# Altium PCB sample.PcbDoc (part 2 of 2)
Units mm, origin at the board's own origin, x right, y up, seen from the top; angles counter-clockwise.
Board outline 130.3 x 75.3 mm, 2 copper layers (Top Layer, Bottom Layer); 117 components, 130 nets, 510 pads, 338 vias.
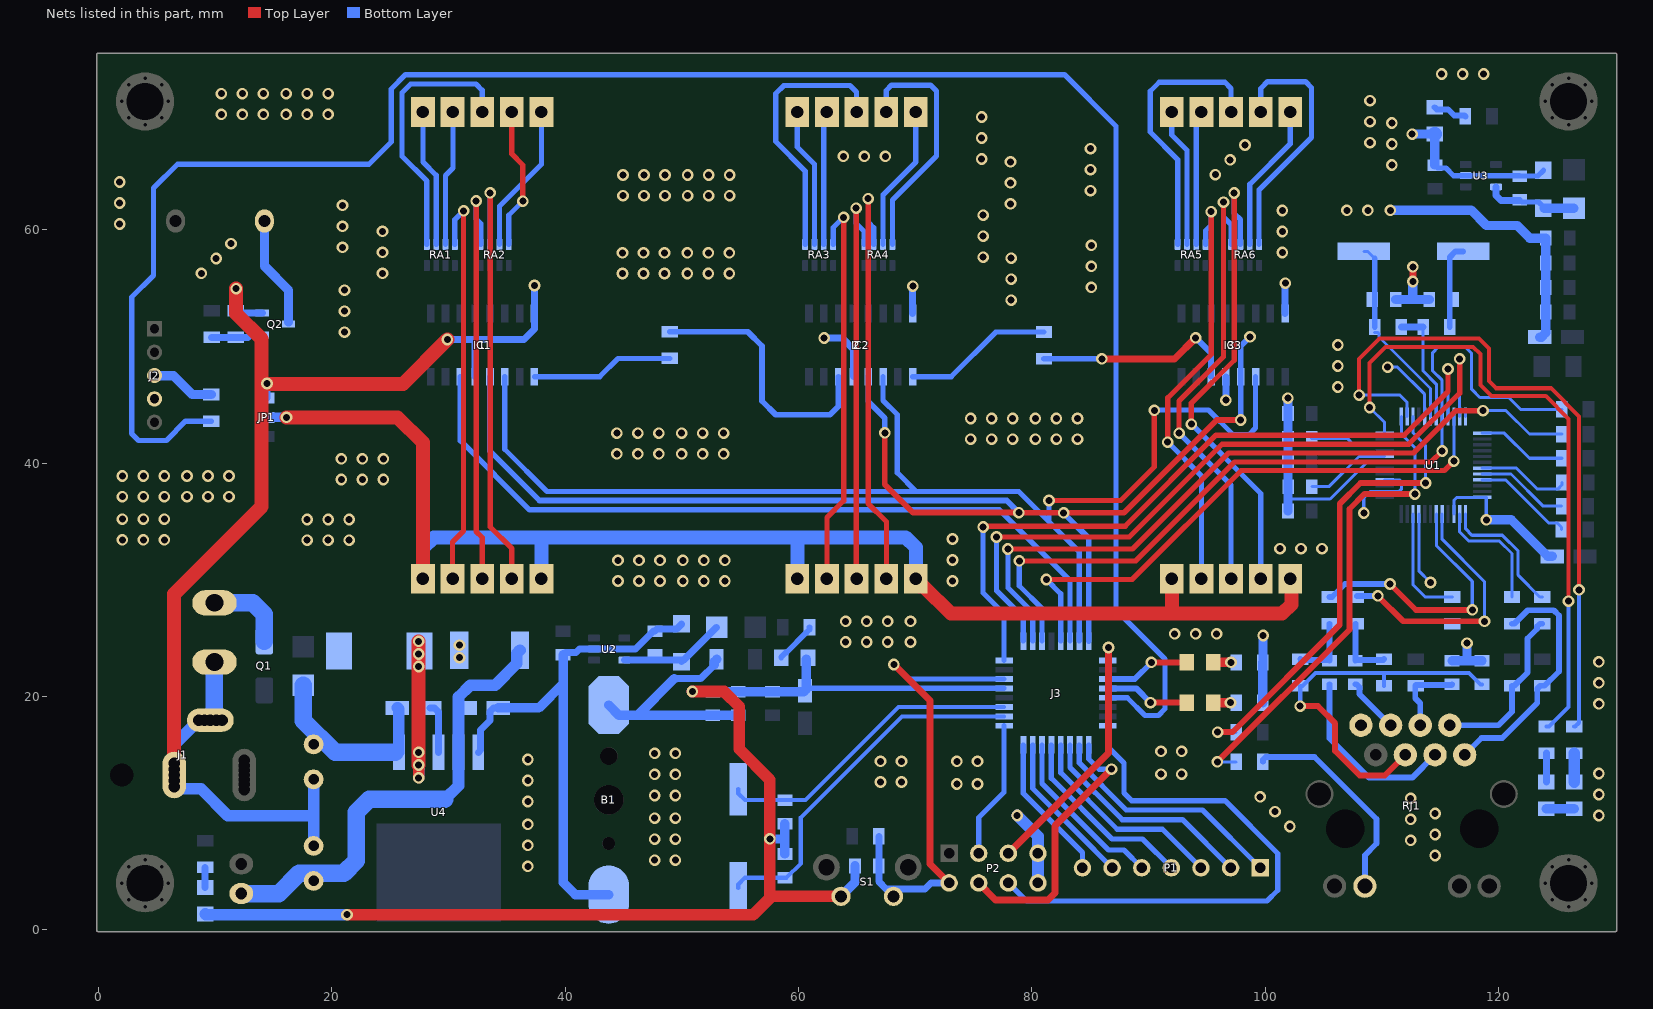
[diagram p2: the nets of this part, all layers, seen from the top]

## Via types
v1: diameter 1, hole 0.6, Top Layer to Bottom Layer, 338 vias

## Nets (pads, with @x,y where several pads share a name; then routed paths per layer and width w, separated by ;. In a path a pad name is that pad's centre, name@x,y a point inside that pad or via, vN(x,y) a via of type N, cw(c..) or ccw(c..) an arc to the next point about the centre after c; other vN are vias at no path point) (continued)
Column1: J3.30 P1.5 | length 14.8
  Bottom Layer w0.45: J3.30@80.875,15.85 80.875,12.55 86.575,6.85 87.895,6.85 P1.5@89.42,5.325
Column2: J3.31 P1.6 | length 13.3
  Bottom Layer w0.45: J3.31@80.075,15.85 80.075,12.13 83.905,8.3 P1.6@86.88,5.325
Column3: J3.32 P1.7 | length 12.6
  Bottom Layer w0.45: J3.32@79.275,15.85 79.275,11.7 84.34,6.635 P1.7@84.34,5.325
COM: 1.1 1.5 2.1 2.5 3.1 3.5 JP1.2 | length 120.5
  Top Layer w1.2: v1(16.125,43.925) 25.65,43.925 27.815,41.76 1.1@27.815,30.1 ; 2.5@70.06,30.1 70.06,29.846 70.476,29.43 70.73,29.43 73.06,27.1 92,27.1 ; 3.1@92,30.1 92,27.1 ; 3.5@102.16,30.1 102.25,30.01 102.25,27.9 101.45,27.1 92,27.1
  Bottom Layer w0.8: JP1.2@14.45,43.925 v1(16.125,43.925)
  Bottom Layer w1.2: 1.1@27.815,30.1 27.815,32.715 28.75,33.65 37.975,33.65 ; 1.5@37.975,30.1 37.975,33.65 ; 2.1@59.9,30.1 59.9,33.625 59.875,33.65 ; 2.5@70.06,30.1 70.06,32.765 69.175,33.65 59.875,33.65 ; 37.975,33.65 59.875,33.65
FB: C28.1 C29.1 JP2.1 L1.2 U4.4 | length 39.9
  Bottom Layer w1: 29.7,11.2 30.86,12.36 U4.4@30.86,15.218 30.86,19.96 31.875,20.975 34,20.975 35.854,22.829 35.854,23.684 L1.2@36.129,23.959
  Bottom Layer w1.5: JP2.1@12.244,3.116 15.441,3.116 17.2,4.875 21.05,4.875 22.1,5.925 22.1,10.1 23.2,11.2 29.7,11.2
GND: B1.2 C1.- C2.1 C3.1 C4.2 C5.2 C7.2 C9.1 C10.- C11.1 C12.1 C13.2 C14.1 C15.2 C16.2 C17.2 C18.2 C19.2 C20.2 C21.2 C22.2 C23.2 C24.2 C25.2 C26.2 C27.2 C28.2 C29.2 C30.2 C31.2 C32.2 C33.2 C34.2 D1.A IC1.8 IC1.13 IC2.8 IC2.13 IC3.8 IC3.13 J1.2 J1.3 J2.4 J3.5 JP1.3 LED1.2 LED2.2 LED4.2 LED5.2 LED7.2 P2.7 P2.8 Q2.2 R17.2 R25.1 R26.1 R33.1 RJ1.8 S1.2 U1.3 U1.9 U1.14 U1.16 U1.19 U1.29 U1.48 U2.2 U3.2 U4.3 U4.5 X1.1 | length 402.7
  Top Layer w0.6: v1(112.65,55.575) v1(112.65,56.825)
  Top Layer w1: v1(21.309,1.298) 56.123,1.298 57.55,2.725 57.55,2.875 ; v1(50.9,20.425) 53.65,20.425 54.925,19.15 54.925,15.5 57.55,12.875 v1(57.55,7.8) 57.55,2.875 ; S1.2@63.65,2.875 57.55,2.875
  Top Layer w1.2: J1.2@6.5,13.275 J1.2@6.5,14.275 6.5,28.775 14,36.275 v1@14,46.8 ; v1(11.807,54.951) 11.807,52.818 14,50.625 v1@14,46.8 ; v1(29.9,50.6) 26.1,46.8 v1@14,46.8
  Bottom Layer w0.26: 101.957,36.925 105.575,36.925 108.725,40.075 U1.19@110.245,40.075 ; v1(108.45,35.725) 108.45,37.025 109,37.575 U1.14@110.245,37.575 110.255,37.585 111.485,37.585 111.7,37.8 111.7,38.375 111.5,38.575 U1.16@110.245,38.575 ; v1(110.5,48.225) 111.35,48.225 113.675,45.9 U1.29@113.675,44.005 ; U1.9@113.175,35.645 113.175,30.775 v1(114.175,29.775) ; U1.3@116.175,35.645 116.175,36.8 116.45,37.075 U1.48@118.605,37.075 118.94,37.075 118.95,37.065 v1(118.95,35.15)
  Bottom Layer w0.45: C30.2@60.55,20.5 60.678,20.628 60.75,20.7 J3.5@77.625,20.7 ; LED1.2@60.678,23.206 LED1.2@60.806,23.334 ; C12.1@114.548,65.541 114.8,65.289 115.486,65.289 116.135,64.64 U3.2@117.185,64.64 ; U3.2@117.191,64.634 121.797,64.634 C11.1@121.825,64.606 123.365,64.606 123.85,65.091 C10.-@123.85,65.105
  Bottom Layer w0.6: v1(11.807,54.951) 11.779,54.924 R33.1@11.779,53.068 11.972,52.875 Q2.2@14.046,52.875 ; JP1.3@14.45,45.575 v1(14.45,46.825) ; C26.2@28.417,19.028 28.817,19.028 29.158,18.687 U4.3@29.158,15.218 ; v1(29.9,50.6) 32.275,50.6 ; IC1.13@32.29,47.413 32.29,50.585 32.275,50.6 ; U4.5@32.562,15.218 32.755,15.411 32.755,17.13 33.564,17.939 33.564,18.728 33.864,19.028 C29.2@34.264,19.028 ; v1(37.375,55.225) 37.37,55.22 37.37,51.495 36.475,50.6 32.275,50.6 ; C3.1@39.832,23.576 40.032,23.776 40.951,23.776 41.242,24.067 U2.2@42.482,24.067 46.034,24.067 47.575,25.608 C2.1@47.71,25.608 47.885,25.783 49.567,25.783 49.977,26.193 C1.-@49.977,26.222 ; v1(62.2,50.725) 63.75,50.725 64.715,49.76 IC2.13@64.715,47.413 ; IC2.8@69.795,52.837 69.795,55.17 v1(69.8,55.175) ; v1(96.625,45.4) 96.64,45.415 IC3.13@96.64,47.401 ; IC3.8@101.72,52.825 101.72,55.42 v1(101.725,55.425)
  Bottom Layer w0.8: C29.2@34.264,19.028 37.753,19.028 39.832,21.107 ; C3.1@39.832,23.576 39.832,21.107 ; B1.2@43.736,3.018 40.882,3.018 39.832,4.068 39.832,21.107 ; v1(50.9,20.425) 50.905,20.42 52.65,20.42 C34.2@52.654,20.416 60.466,20.416 C30.2@60.55,20.5 ; v1(57.55,7.8) 57.554,7.796 58.839,7.796 ; C25.2@58.839,6.502 58.839,7.796 ; C24.2@58.839,9.09 58.839,7.796 ; C30.2@60.678,20.628 LED1.2@60.678,23.206 ; S1.2@63.65,2.875 64.853,4.078 C32.2@64.853,5.486 ; R26.1@99.806,19.477 R25.1@99.806,22.924 99.815,22.934 99.815,25.215 v1(99.825,25.225) ; v1(101.95,45.575) 101.957,45.568 C17.2@101.957,44.27 101.957,36.925 101.957,35.913 C22.2@101.962,35.908 ; v1(110.725,61.675) 117.675,61.675 118.975,60.375 121.6,60.375 122.684,59.291 C18.2@124.06,59.291 124.056,59.287 124.056,52.973 C21.2@124.052,52.969 124.052,51.169 123.678,50.795 C16.2@123.536,50.795 ; C5.2@111.198,54.029 112.638,54.029 ; v1(112.6,68.2) 112.607,68.207 114.518,68.207 LED2.2@114.525,68.214 ; v1(112.65,55.575) 112.638,55.563 112.638,54.029 ; C4.2@114.077,54.029 112.638,54.029 ; C12.1@114.537,65.553 LED2.2@114.537,68.202 ; C7.2@116.026,23.078 117.305,23.078 ; v1(117.3,24.575) 117.305,24.57 117.305,23.078 ; C13.2@118.585,23.078 117.305,23.078 ; v1(118.95,35.15) 121.084,35.15 124.215,32.019 C15.2@124.615,32.019 ; LED4.2@124.103,10.388 LED5.2@126.494,10.388
  Bottom Layer w1: J1.2@6.5,12.546 6.962,12.084 8.791,12.084 11.1,9.775 18.445,9.775 ; J1.2@6.5,14.275 6.5,15.875 J1.3@8.6,17.975 ; LED7.2@9.15,1.358 9.21,1.298 v1(21.309,1.298) ; C28.2@18.445,7.199 18.445,9.775 ; C27.2@18.445,12.901 18.445,9.775 ; v1(78.75,9.8) 80.53,8.02 80.53,5.8 ; P2.8@80.53,4.025 80.53,5.8 ; P2.7@80.53,6.565 80.53,5.8
  Bottom Layer w1.2: LED2.2@114.525,68.214 LED2.2@114.537,68.202
  Bottom Layer w1.5: X1.1@9.95,22.95 9.95,18.125 J1.3@10.1,17.975
  other v1: 36.8,5.45 47.675,5.975 49.45,5.975 114.575,6.375 36.8,7.25 112.475,7.675 47.675,7.775 49.45,7.775 114.575,8.175 102.118,8.855 36.8,9.05 112.475,9.475 47.675,9.575 49.45,9.575 128.6,9.8 114.575,9.975 100.845,10.128 36.8,11 112.475,11.275 99.572,11.401 47.675,11.525 49.45,11.525 128.6,11.6 73.575,12.5 75.35,12.5 67.025,12.675 68.825,12.675 36.8,12.8 47.675,13.325 49.45,13.325 91.075,13.35 92.85,13.35 128.6,13.4 67.025,14.45 68.825,14.45 73.575,14.45 75.35,14.45 36.8,14.6 47.675,15.125 49.45,15.125 91.075,15.3 92.85,15.3 128.6,19.375 128.6,21.175 128.6,22.975 64.05,24.675 65.85,24.675 67.65,24.675 69.6,24.675 92.25,25.375 94.05,25.375 95.85,25.375 64.05,26.45 65.85,26.45 67.65,26.45 69.6,26.45 44.534,29.903 46.334,29.903 48.134,29.903 50.084,29.903 51.884,29.903 53.684,29.903 73.2,29.9 44.534,31.678 46.334,31.678 48.134,31.678 50.084,31.678 51.884,31.678 53.684,31.678 73.2,31.7 101.275,32.675 103.075,32.675 104.875,32.675 17.9,33.4 19.7,33.4 21.5,33.4 2.05,33.425 3.85,33.425 5.65,33.425 73.2,33.5 17.9,35.175 19.7,35.175 21.5,35.175 2.05,35.2 3.85,35.2 5.65,35.2 2.05,37.125 3.85,37.125 5.65,37.125 7.6,37.125 9.4,37.125 11.2,37.125 20.825,38.6 22.625,38.6 24.425,38.6 2.05,38.9 3.85,38.9 5.65,38.9 7.6,38.9 9.4,38.9 11.2,38.9 20.825,40.375 22.625,40.375 24.425,40.375 44.434,40.803 46.234,40.803 48.034,40.803 49.984,40.803 51.784,40.803 53.584,40.803 74.759,42.053 76.559,42.053 78.359,42.053 80.309,42.053 82.109,42.053 83.909,42.053 44.434,42.578 46.234,42.578 48.034,42.578 49.984,42.578 51.784,42.578 53.584,42.578 74.759,43.828 76.559,43.828 78.359,43.828 80.309,43.828 82.109,43.828 83.909,43.828 106.225,46.525 106.225,48.325 106.225,50.125 21.1,51.225 21.1,53.025 78.225,53.975 21.1,54.825 85.1,55.075 78.225,55.775 8.826,56.267 44.925,56.25 46.725,56.25 48.525,56.25 50.475,56.25 52.275,56.25 54.075,56.25 24.35,56.275 85.1,56.875 10.099,57.54 78.225,57.575 75.825,57.65 44.925,58.025 46.725,58.025 48.525,58.025 50.475,58.025 52.275,58.025 54.075,58.025 101.475,58.05 24.35,58.075 20.925,58.5 85.1,58.675 11.372,58.813 75.825,59.45 101.475,59.85 24.35,59.875 20.925,60.3 1.825,60.5 75.825,61.25 101.475,61.65 107,61.675 108.8,61.675 20.925,62.1 78.175,62.225 1.825,62.3 44.959,62.928 46.759,62.928 48.559,62.928 50.509,62.928 52.309,62.928 54.109,62.928 85.025,63.35 78.175,64.025 1.825,64.1 44.959,64.703 46.759,64.703 48.559,64.703 50.509,64.703 52.309,64.703 54.109,64.703 95.724,64.722 85.025,65.15 110.85,65.55 78.175,65.825 96.997,65.995 75.7,66.075 63.85,66.3 65.65,66.3 67.45,66.3 85.025,66.95 98.27,67.268 110.85,67.35 108.985,67.467 75.7,67.875 110.85,69.15 108.985,69.267 75.7,69.675 10.541,69.897 12.341,69.897 14.141,69.897 16.091,69.897 17.891,69.897 19.691,69.897 108.985,71.067 10.541,71.672 12.341,71.672 14.141,71.672 16.091,71.672 17.891,71.672 19.691,71.672 115.125,73.35 116.925,73.35 118.725,73.35
LAN_CS: J3.11 R8.1 U1.32 | length 71.9
  Top Layer w0.45: v1(78.925,31.625) 88.9,31.625 97.375,40.1 114.225,40.1 v1(115.175,41.05)
  Bottom Layer w0.26: v1(115.175,41.05) U1.32@115.175,44.005 115.175,47.1 114.325,47.95 114.325,49.425 114.9,50 117.1,50 117.7,49.4 117.7,46.325 118.4,45.625 120.875,45.625 121.889,44.611 R8.1@125.424,44.611
  Bottom Layer w0.45: v1(78.925,31.625) 78.925,29.5 80.875,27.55 J3.11@80.875,24.75
LAN_INT: J3.10 R6.1 U1.36 | length 64.9
  Top Layer w0.45: v1(77.95,32.65) 88.625,32.65 96.85,40.875 112.725,40.875 116.35,44.5 v1(118.675,44.5)
  Bottom Layer w0.26: U1.36@117.175,44.005 117.175,44.49 117.185,44.5 117.7,44.5 ; v1@118.652,44.5 117.7,44.5 ; R6.1@125.424,42.492 122.658,42.492 120.65,44.5 117.7,44.5
  Bottom Layer w0.45: v1(77.95,32.65) 77.95,29.325 80.075,27.2 J3.10@80.075,24.75
LAN_MISO: J3.13 U1.34 | length 48.7
  Top Layer w0.45: v1(81.25,30.025) 88.6,30.025 97.95,39.375 115.375,39.375 v1(116.175,40.175)
  Bottom Layer w0.26: v1(116.175,40.175) U1.34@116.175,44.005
  Bottom Layer w0.45: v1(81.25,30.025) 82.475,28.8 J3.13@82.475,24.75
LAN_MOSI: J3.9 U1.35 | length 62.6
  Top Layer w0.45: v1(76.975,33.675) 88.35,33.675 96.3,41.625 112.3,41.625 116.675,46 v1(116.675,48.95)
  Bottom Layer w0.26: U1.35@116.675,44.005 v1(116.675,48.95)
  Bottom Layer w0.45: v1(76.975,33.675) 76.975,29.075 79.275,26.775 J3.9@79.275,24.75
LAN_RST: R2.2 U1.37 | length 7.7
  Bottom Layer w0.26: U1.37@118.605,42.575 120.5,42.575 122.654,40.421 R2.2@125.424,40.421
LAN_SCK: J3.8 U1.33 | length 62.8
  Top Layer w0.45: v1(75.825,34.525) 75.9,34.6 88,34.6 95.8,42.4 111.925,42.4 115.675,46.15 v1(115.675,48.075)
  Bottom Layer w0.26: U1.33@115.675,44.005 v1(115.675,48.075)
  Bottom Layer w0.45: v1(75.825,34.525) 75.825,28.9 77.625,27.1 J3.8@77.625,23.1
LCHCLK: IC1.12 IC2.12 IC3.12 J3.16 | length 117.8
  Top Layer w0.5: v1(67.4,42.6) 67.4,38.175 69.813,35.763 v1(78.887,35.763) 78.894,35.756 87.906,35.756 95.85,43.7 v1(97.9,43.7)
  Bottom Layer w0.5: IC1.12@33.56,47.413 33.56,41.04 37.8,36.8 77.85,36.8 v1(78.887,35.763) ; IC2.12@65.985,47.413 65.985,45.29 67.4,43.875 v1(67.4,42.6) ; v1(82.725,35.75) 82.725,35.725 84.875,33.575 J3.16@84.875,24.75 ; v1@97.91,43.71 97.91,50.035 v1(98.7,50.825)
LED2: J3.19 LED3.1 | length 7.3
  Top Layer w0.5: v1(90.25,22.925) 90.256,22.931 93.267,22.931 LED3.1@93.273,22.937
  Bottom Layer w0.5: J3.19@86.525,21.5 88.825,21.5 v1(90.25,22.925)
LED3: J3.20 LED6.1 | length 7.3
  Top Layer w0.5: v1@90.176,19.476 LED6.1@93.273,19.477
  Bottom Layer w0.5: J3.20@86.525,20.7 88.95,20.7 v1(90.175,19.475)
LINK: R21.1 RJ1.11 | length 18.4
  Bottom Layer w0.5: R21.1@99.806,14.404 99.806,14.575 100.056,14.825 104.225,14.825 109.55,9.5 109.55,7.4 108.55,6.4 RJ1.11@108.55,3.75
Net1_2: 1.2 RA1.8 | length 35.1
  Top Layer w0.45: 1.2@30.355,30.1 30.355,33.255 31.3,34.2 v1(31.3,61.625)
  Bottom Layer w0.45: RA1.8@30.55,58.75 30.55,60.875 v1(31.3,61.625)
Net1_3: 1.3 RA2.5 | length 36.5
  Top Layer w0.45: v1(32.375,62.475) 32.375,34.15 32.895,33.63 1.3@32.895,30.1
  Bottom Layer w0.45: v1(32.375,62.475) 32.375,60.95 32.775,60.55 RA2.5@32.775,58.75
Net1_4: 1.4 RA2.6 | length 38.3
  Top Layer w0.45: v1(33.575,63.175) 33.575,34.55 35.435,32.69 1.4@35.435,30.1
  Bottom Layer w0.45: RA2.6@33.575,58.75 v1(33.575,63.175)
Net1_6: 1.6 RA2.7 | length 12.8
  Bottom Layer w0.45: RA2.7@34.375,58.75 34.375,62.025 37.975,65.625 1.6@37.975,70.1
Net1_7: 1.7 RA2.8 | length 12.6
  Top Layer w0.45: 1.7@35.435,70.1 35.435,66.49 36.375,65.55 v1(36.375,62.45)
  Bottom Layer w0.45: RA2.8@35.175,58.75 35.175,61.25 v1(36.375,62.45) ; 1.7@35.175,69.84 1.7@35.435,70.1
Net1_8: 1.8 RA1.5 | length 23.1
  Bottom Layer w0.45: RA1.5@28.15,58.75 28.15,64.175 26.025,66.3 26.025,71.75 26.775,72.5 32.35,72.5 32.895,71.955 1.8@32.895,70.1
Net1_9: 1.9 RA1.7 | length 11.6
  Bottom Layer w0.45: RA1.7@29.75,58.75 29.75,64.65 30.4,65.3 30.4,70.055 1.9@30.355,70.1
Net1_10: 1.10 RA1.6 | length 11.8
  Bottom Layer w0.45: 1.10@27.815,70.1 27.815,65.81 28.95,64.675 RA1.6@28.95,58.75
Net2_2: 2.2 RA3.8 | length 34.3
  Top Layer w0.45: 2.2@62.44,30.1 62.44,35.34 63.875,36.775 v1(63.875,61.075)
  Bottom Layer w0.45: RA3.8@62.975,58.75 62.975,60.175 v1(63.875,61.075)
Net2_3: 2.3 RA4.5 | length 35.2
  Top Layer w0.45: v1(64.95,61.85) 64.95,30.13 2.3@64.98,30.1
  Bottom Layer w0.45: v1(64.95,61.85) 64.95,60.55 65.625,59.875 65.625,58.775 RA4.5@65.65,58.75
Net2_4: 2.4 RA4.6 | length 37.4
  Top Layer w0.45: v1(65.975,62.675) 65.975,36.55 67.55,34.975 67.55,30.13 2.4@67.52,30.1
  Bottom Layer w0.45: v1(65.975,62.675) 66,62.65 66,60.625 66.45,60.175 RA4.6@66.45,58.75
Net2_6: 2.6 RA4.7 | length 12.5
  Bottom Layer w0.45: RA4.7@67.25,58.75 67.25,63 70.06,65.81 2.6@70.06,70.1
Net2_7: 2.7 RA4.8 | length 21.3
  Bottom Layer w0.45: 2.7@67.52,70.1 67.52,71.945 67.975,72.4 71.325,72.4 71.825,71.9 71.825,66.325 68.05,62.55 RA4.8@68.05,58.75
Net2_8: 2.8 RA3.5 | length 23.1
  Bottom Layer w0.45: RA3.5@60.575,58.75 60.575,65.05 58.05,67.575 58.05,71.675 58.75,72.375 64.425,72.375 64.98,71.82 2.8@64.98,70.1
Net2_9: 2.9 RA3.7 | length 11.5
  Bottom Layer w0.45: RA3.7@62.175,58.75 62.175,69.835 2.9@62.44,70.1
Net2_10: 2.10 RA3.6 | length 12
  Bottom Layer w0.45: 2.10@59.9,70.1 59.9,67.1 61.375,65.625 RA3.6@61.375,58.75
Net3_2: 3.2 RA5.8 | length 37.2
  Top Layer w0.45: v1(91.65,41.8) 91.65,45.6 95.375,49.325 v1(95.375,61.55)
  Bottom Layer w0.45: v1(91.65,41.8) 94.54,38.91 3.2@94.54,30.1 ; RA5.8@94.9,58.75 94.9,59.925 95.375,60.4 v1(95.375,61.55)
Net3_3: 3.3 RA6.5 | length 39.6
  Top Layer w0.45: v1(92.625,42.575) 92.625,45.325 96.425,49.125 v1(96.425,62.375)
  Bottom Layer w0.45: v1(92.625,42.575) 97.08,38.12 3.3@97.08,30.1 ; v1(96.425,62.375) 96.425,61.1 97.075,60.45 RA6.5@97.075,58.75
Net3_4: 3.4 RA6.6 | length 41.7
  Top Layer w0.45: v1(93.675,43.35) 93.675,45.15 97.35,48.825 v1(97.35,63.15)
  Bottom Layer w0.45: v1(93.675,43.35) 99.62,37.405 3.4@99.62,30.1 ; v1(97.35,63.15) 97.35,61.4 97.875,60.875 RA6.6@97.875,58.75
Net3_6: 3.6 RA6.7 | length 12.8
  Bottom Layer w0.45: RA6.7@98.675,58.75 98.675,63.9 102.16,67.385 3.6@102.16,70.1
Net3_7: 3.7 RA6.8 | length 22.1
  Bottom Layer w0.45: RA6.8@99.475,58.75 99.475,63.425 103.975,67.925 103.975,72.175 103.45,72.7 100.2,72.7 99.62,72.12 3.7@99.62,70.1
Net3_8: 3.8 RA5.5 | length 23.6
  Bottom Layer w0.45: RA5.5@92.5,58.75 92.5,66.025 90.15,68.375 90.15,71.875 90.925,72.65 96.55,72.65 97.08,72.12 3.8@97.08,70.1
Net3_9: 3.9 RA5.7 | length 11.5
  Bottom Layer w0.45: RA5.7@94.1,58.75 94.1,69.66 3.9@94.54,70.1
Net3_10: 3.10 RA5.6 | length 11.9
  Bottom Layer w0.45: 3.10@92,70.1 92,68.125 93.3,66.825 RA5.6@93.3,58.75
NetB1_1: B1.1 C33.1 C34.1 D2.1 | length 20.4
  Bottom Layer w0.6: 49.341,21.525 51.604,21.525 D2.1@52.793,22.713
  Bottom Layer w0.8: B1.1@43.736,19.274 44.627,18.384 46.2,18.384 ; 49.341,21.525 46.2,18.384 ; D2.1@52.793,22.713 52.793,22.988 D2.1@52.993,23.188 ; C33.1@54.841,18.384 C34.1@52.654,18.384 46.2,18.384
NetC1_+: C1.+ C2.2 F1.1 U2.5 | length 10.5
  Bottom Layer w0.5: C1.+@49.822,23.117 C1.+@49.977,22.962
  Bottom Layer w0.6: U2.5@45.082,23.117 48.6,23.117 ; C1.+@49.822,23.117 48.6,23.117 ; F1.1@52.993,25.937 50.172,23.117 48.6,23.117
NetC4_1: C4.1 R1.1 Y1.1 | length 7.3
  Bottom Layer w0.5: R1.1@115.823,51.679 115.823,57.654 116.323,58.154 Y1.1@116.957,58.154
NetC5_1: C5.1 R3.2 U1.30 Y1.2 | length 16.4
  Bottom Layer w0.26: Y1.2@108.457,58.154 108.769,58.154 Y1.2@109.389,57.534 ; R3.2@109.389,51.186 109.682,51.186 109.758,51.11 109.758,50.817 114.175,46.4 U1.30@114.175,44.005
  Bottom Layer w0.5: R3.2@109.389,51.679 109.389,54.029 Y1.2@109.389,57.534
NetC6_1: C6.1 RJ1.3 | length 15.9
  Bottom Layer w0.5: C6.1@105.523,21.046 105.523,16.427 108.9,13.05 112.61,13.05 RJ1.3@114.56,15
NetC7_1: C7.1 R14.1 RJ1.4 | length 6.8
  Bottom Layer w0.5: RJ1.4@113.29,17.54 113.29,19.435 112.866,19.859 112.866,20.919 112.929,20.983 115.962,20.983 C7.1@116.026,21.046
NetC8_1: C8.1 RJ1.6 | length 4.8
  Bottom Layer w0.5: C8.1@107.728,21.046 107.834,21.046 108.084,20.796 108.084,20.207 RJ1.6@110.75,17.54
NetC9_2: C9.2 U1.20 | length 7.3
  Bottom Layer w0.26: C9.2@103.999,37.985 105.46,37.985 108.05,40.575 U1.20@110.245,40.575
NetC10_+: C10.+ C11.2 F2.1 U3.5 | length 8
  Bottom Layer w0.45: C11.2@121.776,62.525 C11.2@121.825,62.574 122.019,62.38 123.178,62.38 123.18,62.378 123.441,62.378 123.926,61.893 C10.+@123.926,61.853 ; F2.1@126.453,61.853 F2.1@126.473,61.833
  Bottom Layer w0.6: U3.5@119.785,63.69 119.785,62.94 120.2,62.525 C11.2@121.776,62.525
  Bottom Layer w0.8: C10.+@123.926,61.853 F2.1@126.453,61.853
NetC13_1: C13.1 R19.1 R20.1 RJ1.5 | length 32.9
  Top Layer w0.5: v1(103,19.175) 104.525,19.175 106,17.7 106,15.325 108.1,13.225 110.245,13.225 RJ1.5@112.02,15
  Bottom Layer w0.35: v1(103,19.175) 103.007,19.182 R19.1@103.007,20.919 103.206,20.919 104.311,22.025 110.192,22.025 ; R20.1@110.192,20.919 110.192,22.025 ; C13.1@118.585,21.046 118.45,21.046 117.471,22.025 110.192,22.025
NetC14_2: C14.2 U1.22 | length 6.5
  Bottom Layer w0.26: C14.2@103.992,42.115 104.002,42.125 107.025,42.125 107.575,41.575 U1.22@110.245,41.575
NetC26_1: C26.1 C27.1 F3.2 U4.1 | length 15.9
  Bottom Layer w1: C26.1@25.617,19.028 25.654,19.028 25.754,18.928 U4.1@25.754,15.218
  Bottom Layer w1.5: F3.2@17.563,20.969 17.563,17.937 20.282,15.218 U4.1@25.425,15.218
NetD1_C: D1.C L1.1 U4.2 | length 13.9
  Top Layer w1: v1(27.45,13.025) v1(27.45,14.125)
  Top Layer w1.2: v1(27.45,14.125) v1@27.45,15.215 ; v1(27.45,22.575) v1(27.45,23.65) v1(27.45,24.725) ; v1(27.453,15.215) v1@27.453,22.572
  Bottom Layer w0.6: U4.2@27.453,14.122 v1(27.45,14.125) 27.453,14.128 v1(27.453,15.215) U4.2@27.456,15.218
  Bottom Layer w1: v1(27.45,13.025) v1(27.45,14.125)
  other v1: 30.95,23.325 30.95,24.4
NetIC1_9: IC1.9 R28.1 | length 12.2
  Bottom Layer w0.45: IC1.9@37.37,47.413 42.963,47.413 44.532,48.982 R28.1@48.967,48.982
NetIC2_9: IC2.9 R34.1 | length 12.8
  Bottom Layer w0.45: IC2.9@69.795,47.413 73.088,47.413 76.918,51.243 R34.1@81.038,51.243
NetIC2_14: IC2.14 R28.2 | length 23
  Bottom Layer w0.5: R28.2@48.967,51.268 55.659,51.268 56.875,50.052 56.875,45.325 58.05,44.15 62.7,44.15 63.445,44.895 IC2.14@63.445,47.413
NetIC3_14: IC3.14 R34.2 | length 17.7
  Top Layer w0.6: v1(86.007,48.936) 92.236,48.936 v1(94.05,50.75)
  Bottom Layer w0.5: R34.2@81.038,48.957 81.049,48.947 85.997,48.947 v1(86.007,48.936) ; v1(94.05,50.75) 95.37,49.43 IC3.14@95.37,47.401
NetJ2_3: J2.3 R30.1 | length 5.6
  Bottom Layer w0.8: J2.3@4.805,47.512 4.826,47.491 6.434,47.491 8.039,45.886 R30.1@9.686,45.886
NetLED1_1: LED1.1 R4.1 | length 3.7
  Bottom Layer w0.5: LED1.1@58.52,23.334 58.52,23.398 58.905,23.783 58.969,23.783 60.675,25.489 60.691,25.489 60.941,25.739 R4.1@60.941,25.937
NetLED2_1: LED2.1 R18.1 | length 3
  Bottom Layer w0.5: LED2.1@114.525,70.5 114.706,70.319 115.681,70.319 116.2,69.8 117.082,69.8 R18.1@117.157,69.725
NetLED3_2: LED3.2 R25.2 | length 1.5
  Top Layer w0.8: LED3.2@95.559,22.937 95.562,22.934 97.066,22.934 v1(97.075,22.925)
NetLED4_1: LED4.1 R23.2 | length 2.5
  Bottom Layer w0.6: LED4.1@124.103,12.674 124.109,12.681 124.109,15.137 R23.2@124.116,15.143
NetLED5_1: LED5.1 R24.2 | length 2.5
  Bottom Layer w1: LED5.1@126.494,12.674 R24.2@126.494,15.143
NetLED6_2: LED6.2 R26.2 | length 1.5
  Top Layer w0.8: LED6.2@95.559,19.476 v1@97.024,19.476
  other v1: 97.025,19.475
NetLED7_1: LED7.1 R27.2 | length 1.7
  Bottom Layer w0.6: LED7.1@9.15,3.644 R27.2@9.15,5.357
NetQ1_A: Q1.A X1.2 | length 7
  Bottom Layer w1.5: X1.2@9.95,28.03 9.955,28.025 13.25,28.025 14.224,27.051 Q1.A@14.224,24.719
NetQ2_1: Q2.1 R32.1 R33.2 | length 4.4
  Bottom Layer w0.6: R32.1@9.711,50.782 12.807,50.782 13,50.975 Q2.1@14.046,50.975
NetQ2_3: Q2.3 SP1.2 | length 9.5
  Bottom Layer w0.8: SP1.2@14.235,60.75 14.235,56.89 16.296,54.829 Q2.3@16.296,52.1
NetR1_2: R1.2 R3.1 U1.31 | length 10
  Bottom Layer w0.26: R1.2@113.537,51.679 113.537,47.913 114.675,46.775 U1.31@114.675,44.005
  Bottom Layer w0.6: R3.1@111.675,51.679 R1.2@113.537,51.679
NetR5_2: R5.2 U1.1 | length 11.5
  Bottom Layer w0.28: U1.1@117.175,35.645 117.175,34.375 117.725,33.825 120.325,33.825 121.675,32.475 121.675,30.408 123.553,28.53 R5.2@123.751,28.53
NetR7_2: R7.2 U1.2 | length 10.5
  Bottom Layer w0.26: U1.2@116.675,35.645 116.675,34.1 117.425,33.35 120.05,33.35 121.15,32.25 R7.2@121.15,28.53
NetR10_1: R10.1 U1.43 | length 7.9
  Bottom Layer w0.26: U1.43@118.605,39.575 121.55,39.575 123.35,37.775 125.065,37.775 125.435,38.145 R10.1@125.435,38.343
NetR11_1: R11.1 U1.44 | length 7.9
  Bottom Layer w0.26: U1.44@118.605,39.075 121.075,39.075 123.832,36.318 R11.1@125.41,36.318
NetR12_1: R12.1 U1.45 | length 8.7
  Bottom Layer w0.26: U1.45@118.605,38.575 120.6,38.575 124.3,34.875 125.027,34.875 125.397,34.505 R12.1@125.397,34.313
NetR13_2: R13.2 U1.5 | length 22.7
  Top Layer w0.5: v1(109.65,28.625) 111.825,26.45 v1(118.8,26.45)
  Bottom Layer w0.26: R13.2@107.764,28.53 R13.2@107.859,28.625 ; U1.5@115.175,35.645 115.175,33.475 118.8,29.85 v1(118.8,26.45)
  Bottom Layer w0.5: R13.2@107.859,28.625 v1(109.65,28.625)
NetR15_2: R15.2 U1.6 | length 23.1
  Top Layer w0.5: v1(110.7,29.65) 112.925,27.425 v1(117.75,27.425)
  Bottom Layer w0.26: U1.6@114.675,35.645 114.675,32.95 117.75,29.875 v1(117.75,27.425)
  Bottom Layer w0.5: R15.2@105.536,28.517 R15.2@105.523,28.53 105.721,28.53 106.841,29.65 v1(110.7,29.65)
NetR17_1: R17.1 U1.10 | length 9.9
  Bottom Layer w0.26: U1.10@112.675,35.645 112.675,29.575 113.72,28.53 R17.1@116.037,28.53
NetR21_2: R21.2 U1.25 | length 41.2
  Top Layer w0.5: v1(95.9,14.4) 107.225,25.725 107.225,36.075 108.5,37.35 v1(112.825,37.35)
  Bottom Layer w0.26: v1(95.9,14.4) 97.516,14.4 R21.2@97.52,14.404 ; U1.25@111.675,44.005 111.675,42.5 112.825,41.35 v1(112.825,37.35)
NetR22_2: R22.2 U1.27 | length 40.5
  Top Layer w0.5: v1(95.925,16.95) 97.2,16.95 106.4,26.15 106.4,36.525 108.175,38.3 v1(113.75,38.3)
  Bottom Layer w0.26: v1(95.925,16.95) 97.501,16.95 R22.2@97.52,16.931 ; U1.27@112.675,44.005 112.675,42.6 113.75,41.525 v1(113.75,38.3)
NetR23_1: R23.1 U1.24 | length 55.6
  Top Layer w0.35: v1(108.95,44.775) 108.95,48.6 110.325,49.975 117.825,49.975 118.45,49.35 118.45,46.7 119.4,45.75 124.05,45.75 126,43.8 v1(126,28.175)
  Bottom Layer w0.26: v1(108.95,44.775) 110.245,43.48 U1.24@110.245,42.575
  Bottom Layer w0.35: R23.1@124.116,17.429 124.314,17.429 126,19.115 v1(126,28.175)
NetR24_1: R24.1 U1.26 | length 59.4
  Top Layer w0.35: v1(108.05,45.825) 108.05,48.925 109.8,50.675 118.325,50.675 119.175,49.825 119.175,47.05 119.8,46.425 124.482,46.425 126.9,44.007 v1(126.9,29.15)
  Bottom Layer w0.26: v1(108.05,45.825) 111.55,45.825 112.175,45.2 U1.26@112.175,44.005
  Bottom Layer w0.35: R24.1@126.494,17.429 126.575,17.429 126.9,17.754 v1(126.9,29.15)
NRST: C32.1 J3.6 P2.2 R29.1 S1.1 | length 41.9
  Top Layer w0.6: v1(68.175,22.75) 71.275,19.65 71.275,5.66 P2.2@72.91,4.025
  Bottom Layer w0.45: v1(68.175,22.75) 69.425,21.5 J3.6@77.625,21.5
  Bottom Layer w0.6: C32.1@66.885,5.486 66.885,4.14 67.518,3.507 ; C32.1@66.894,5.495 R29.1@66.894,8.015 ; S1.1@68.15,2.875 67.518,3.507 ; P2.2@72.91,4.025 71.35,4.025 70.832,3.507 67.518,3.507
OSC_IN: C25.1 J3.2 Y2.1 | length 31.4
  Bottom Layer w0.35: Y2.1@54.841,3.575 54.841,3.895 55.416,4.47 C25.1@58.839,4.47 58.974,4.47 60.2,5.696 60.2,9.625 68.875,18.3 J3.2@77.625,18.3
OSC_OUT: C24.1 J3.3 Y2.2 | length 26.7
  Bottom Layer w0.35: Y2.2@54.841,12.075 54.841,11.697 55.416,11.122 C24.1@58.839,11.122 60.597,11.122 68.575,19.1 J3.3@77.625,19.1
RJ45_RXN: C8.2 R13.1 R20.2 | length 5.7
  Bottom Layer w0.5: R13.1@107.764,26.244 107.746,26.226 107.746,23.097 C8.2@107.728,23.078 107.791,23.142 110.128,23.142 R20.2@110.192,23.205
RJ45_RXP: C6.2 R15.1 R19.2 | length 5.7
  Bottom Layer w0.5: R19.2@103.007,23.205 103.071,23.142 105.46,23.142 C6.2@105.523,23.078 R15.1@105.523,26.244
ROW1: J3.26 P1.1 | length 20.8
  Bottom Layer w0.45: J3.26@84.075,15.85 84.075,14.3 88.1,10.275 94.63,10.275 P1.1@99.58,5.325
ROW2: J3.27 P1.2 | length 19.3
  Bottom Layer w0.45: J3.27@83.275,15.85 83.275,13.925 87.75,9.45 92.915,9.45 P1.2@97.04,5.325
ROW3: J3.28 P1.3 | length 17.8
  Bottom Layer w0.45: J3.28@82.475,15.85 82.475,13.475 87.325,8.625 91.2,8.625 P1.3@94.5,5.325
ROW4: J3.29 P1.4 | length 16.3
  Bottom Layer w0.45: J3.29@81.675,15.85 81.675,13 86.875,7.8 89.485,7.8 P1.4@91.96,5.325
RXD_SET: J3.1 P2.3 | length 11.8
  Bottom Layer w0.45: P2.3@75.45,6.565 75.45,9.625 77.625,11.8 J3.1@77.625,17.5
SDI: IC1.14 J3.14 | length 67.9
  Bottom Layer w0.45: IC1.14@31.02,47.413 31.02,41.93 36.95,36 77.225,36 83.275,29.95 J3.14@83.275,24.75
SFTCLK: IC1.11 IC2.11 IC3.11 J3.15 | length 108.8
  Top Layer w0.45: v1(81.475,36.8) 87.625,36.8 90.5,39.675 v1(90.5,44.525)
  Bottom Layer w0.45: IC1.11@34.83,47.413 34.83,41.195 38.45,37.575 70.075,37.575 ; IC2.11@67.255,47.413 67.255,45.37 68.475,44.15 68.475,39.175 70.075,37.575 ; v1(81.475,36.8) 81.475,34.975 ; J3.15@84.075,24.75 84.075,32.375 81.475,34.975 ; v1(90.5,44.525) 90.525,44.55 95.15,44.55 97.266,42.434 98.603,42.434 99.18,43.011 IC3.11@99.18,47.401 ; 70.075,37.575 78.875,37.575 81.475,34.975
SWCLK: J3.25 P2.4 | length 23.5
  Top Layer w0.6: P2.4@75.45,4.025 76.9,2.575 81.375,2.575 81.975,3.175 81.975,8.925 v1(86.825,13.775)
  Bottom Layer w0.45: J3.25@84.875,15.85 84.875,14.65 85.75,13.775 v1(86.825,13.775)
SWDIO: J3.24 P2.6 | length 48.9
  Bottom Layer w0.45: P2.6@77.99,4.025 79.54,2.475 100.15,2.475 101.075,3.4 101.075,6.55 96.55,11.075 88.55,11.075 87.9,11.725 87.9,14.3 86.525,15.675 J3.24@86.525,17.5
TX_RFID: J3.21 R30.2 | length 178
  Bottom Layer w0.45: R30.2@9.686,43.6 7.475,43.6 5.825,41.95 3.45,41.95 2.85,42.55 2.85,54.225 4.725,56.1 4.725,63.575 6.775,65.625 23.2,65.625 25.1,67.525 25.1,72.075 26.325,73.3 82.8,73.3 87.225,68.875 87.225,27.425 91.425,23.225 91.425,18.95 90.85,18.375 89.7,18.375 88.175,19.9 J3.21@86.525,19.9
TXD: J3.17 P2.5 | length 22.3
  Top Layer w0.6: P2.5@77.99,6.565 86.575,15.15 v1(86.575,24.2)
  Bottom Layer w0.45: J3.17@86.525,23.1 86.55,23.1 86.575,23.125 v1(86.575,24.2)
TXN: R5.1 R16.1 RJ1.2 | length 14.7
  Bottom Layer w0.5: RJ1.2@115.83,17.54 119.99,17.54 121.15,18.7 R16.1@121.15,20.919 121.348,20.919 122.475,22.046 122.475,24.968 123.303,25.796 123.303,25.994 123.553,26.244 R5.1@123.751,26.244
TXP: R7.1 R9.1 RJ1.1 | length 21.2
  Bottom Layer w0.5: RJ1.1@117.1,15 118.55,16.45 120.325,16.45 123.325,19.45 123.325,20.669 123.575,20.919 R9.1@123.751,20.919 123.95,20.919 125.175,22.145 125.175,26.95 124.725,27.4 122.504,27.4 121.348,26.244 R7.1@121.15,26.244
pads on no net: B1.0 IC3.9 J1.MH J2.2 J2.5 J3.7 J3.18 J3.22 J3.23 Q1.0 RA1.0 RA2.0 RA3.0 RA4.0 RA5.0 RA6.0 RJ1. RJ1.7 S1.MH Screw1.S Screw2.S Screw3.S Screw4.S U1.7 U1.12 U1.13 U1.18 U1.23 U1.38 U1.39 U1.40 U1.41 U1.42 U1.46 U1.47 U2.0 U2.4 U3.0 U3.4 U4.6

## Polygon pours and split planes (outlines as drawn)
GND on Bottom Layer "NONET_L-01_P-001" (hatched 45Degree grid 0.508 track 0.203, remove dead copper, pour order 0): 0,75 130,75 130,0 0,0
GND on Top Layer "NONET_L-01_P-001" (hatched 45Degree grid 0.508 track 0.203, remove dead copper, pour order 1): 0,75 130,75 130,0 0,0

## Keep-outs
Keep-Out Layer:
  lines w0.3: 0,0 130,0 130,75 0,75 0,0

## Other copper
Top Layer:
  rectangle net +5: 67.9,48.75 69.15,51.325
  rectangle net 3.3A: 120,47 122.5,49.5
  rectangle net +5: 14.75,29.85 18.45,31.05
  rectangle net NetD1_C: 26.3,22.125 31.8,25.7
  rectangle net NetD1_C: 26.825,12.45 28.075,16.85
Bottom Layer:
  rectangle net +5: 26.075,46.675 28.45,47.9
  rectangle net +5: 89.35,46.725 92.8,47.85
  rectangle net +5: 35.525,43.6 36.675,45.925
  rectangle net +5: 67.95,48.5 69.075,51.075
  rectangle net +5: 57.55,46.875 60.85,47.95
  rectangle net 3.3A: 120,47 122.5,49.5
  region net NetC10_+: 126.5,61.275 126.5,63.025 119.775,63.025 119.775,61.275
  rectangle net NetC10_+: 119.375,61.275 120.175,63.725
  rectangle net +5: 14.7,29.85 18.4,31.05
  pour cut-out: 106.957,60.654 118.457,60.654 118.457,55.654 106.957,55.654
  pour cut-out: 78.525,23.35 79.025,23.85 85.125,23.85 85.625,23.35 85.625,17.25 85.125,16.75 79.025,16.75 78.525,17.25
  pour cut-out: 52.341,13.575 57.341,13.575 57.341,2.075 52.341,2.075

## Silkscreen, mask and mechanical layers (free items; w line width, h text height)
Top Overlay:
  text "LIGHT 1" at 97.075,22.274 h2
  text "LIGHT 2" at 97.125,18.749 h2
Bottom Overlay:
  text "+5V  F   D  GND  F" at 1.559,52.725 h1.3 r90
  text "+12V" at 12.6,34.55 h2
  text ">>" at 10.119,33.875 h2 r90
  text ">>" at 8.494,33.85 h2 r90
  text "GND TX RX 3.3V" at 81.525,8.716 h1.3
  text "GND DIO CLK RST" at 81.925,0.991 h1.3
  text "R1 R2 R3 R4 C1 C2 C3" at 101.025,0.997 h1.8

## Dimensions
130,0 to 0,0 on Mechanical 1
130,0 to 130,75 on Mechanical 1

## Text inside footprints (layer, text, board x,y; h text height)
J3: Bottom Overlay "1" at 77.909,17.201 h1.02 r270
X1: Bottom Overlay "1" at 5.315,22.918 h1.27 r270; Bottom Overlay "2" at 5.315,27.744 h1.27 r270